# EAGLE board rtc module (EAGLE 6.5.0)
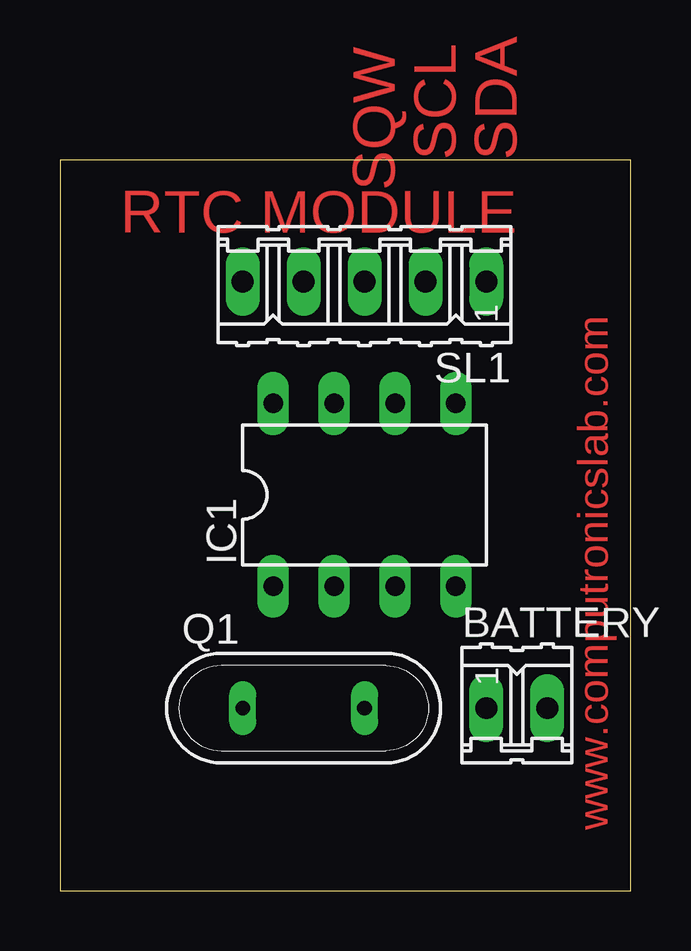
[diagram p0: board, top side]
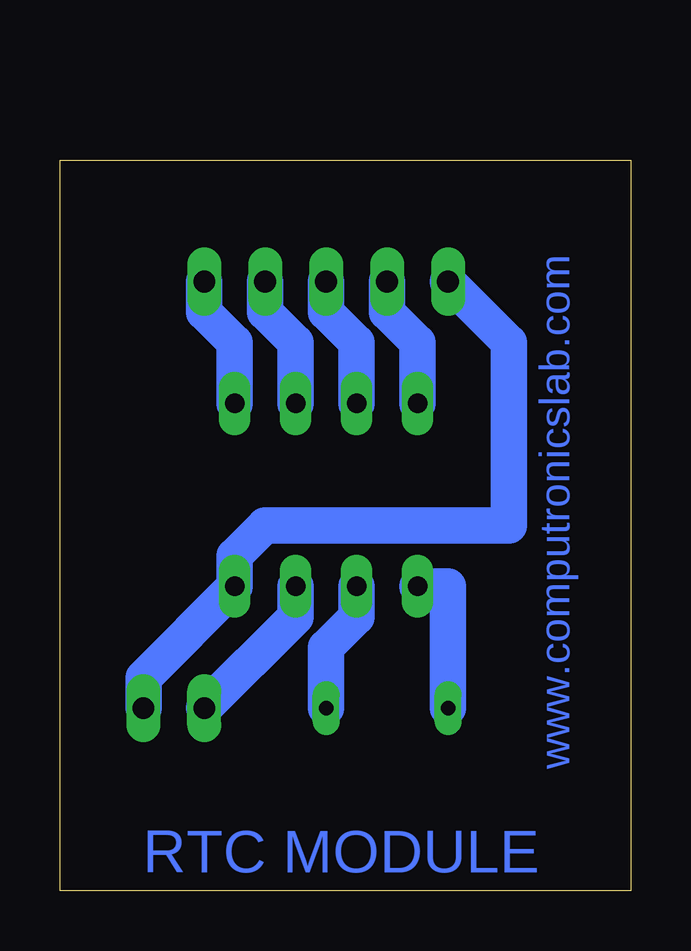
[diagram p1: board, bottom side, seen from below]

Size 23.8 x 30.47 mm. Coordinates in mm from the lower left corner, seen from the top.
Outline: 0,0 23.8,0 23.8,30.47 0,30.47 0,0
Copper layers (1*16): Top 0.035mm / dielectric 1.5mm / Bottom 0.035mm
Design rules "default *": minimum track width 60mil, minimum drill 24mil, track to track 8mil, track to pad 8mil, pad to pad 8mil, via to via 8mil, smd to smd 8mil, copper to edge 40mil, drill to drill 8mil, minimum pad ring 10mil, minimum via ring 8mil, stop-mask expansion 4mil, vias tented up to drill 0mil, thermal gap 10mil

## Footprints (pad centres in the part's own frame; a part is rotated, then mirrored left to right if it is on the bottom)
02P = drill 0.914 long: 1 -1.27,0; 2 1.27,0
DIL08 = drill 0.813 long: 1 -3.81,-3.81; 2 -1.27,-3.81; 3 1.27,-3.81; 4 3.81,-3.81; 5 3.81,3.81; 6 1.27,3.81; 7 -1.27,3.81; 8 -3.81,3.81
QS = drill 0.61 long: 1 -2.54,0; 2 2.54,0
05P = drill 0.914 long: 1 -5.08,0; 2 -2.54,0; 3 0,0; 4 2.54,0; 5 5.08,0

## Placement (x,y rotation side)
BATTERY  3.3v  [02P]  19.05,7.62 0 top
IC1  DS1307  [DIL08]  12.7,16.51 0 top
Q1  32KHZ  [QS]  10.16,7.62 0 top
SL1  5 pin  [05P]  12.7,25.4 180 top

## Library data of the parts
BATTERY SL1 = con-amp-quick; OC_FARNELL: unknown; OC_NEWARK: unknown
IC1 = maxim; MPN: DS1621; OC_FARNELL: 1188024; OC_NEWARK: 66F3769
Q1 = special

## Nets
N$1: IC1.1 Q1.1
N$2: IC1.2 Q1.2
N$3: IC1.6 SL1.2
N$4: IC1.7 SL1.3
N$5: IC1.8 SL1.4
N$6: BATTERY.1 IC1.3
N$7: BATTERY.2 IC1.4 SL1.5
N$8: IC1.5 SL1.1

## Tracks (layer width: path | path; a pad name or v marks a point on that pad's centre or on a via)
N$1
  Bottom 1.524: Q1.1 7.62,12.7 IC1.1
N$2
  Bottom 1.524: Q1.2 12.7,10.16 11.43,11.43 IC1.2
N$3
  Bottom 1.524: IC1.6 13.97,22.86 15.24,24.13 SL1.2
N$4
  Bottom 1.524: IC1.7 11.43,22.86 12.7,24.13 SL1.3
N$5
  Bottom 1.524: IC1.8 8.89,22.86 10.16,24.13 SL1.4
N$6
  Bottom 1.524: IC1.3 13.97,11.43 BATTERY.1
N$7
  Bottom 1.524: BATTERY.2 20.32,8.89 IC1.4 16.51,13.97 15.24,15.24 5.08,15.24 5.08,22.86 SL1.5
N$8
  Bottom 1.524: IC1.5 16.51,22.86 17.78,24.13 SL1.1

## Text on the board
Top: SCL | SDA | SQW | RTC MODULE | www.computronicslab.com
Bottom: www.computronicslab.com | RTC MODULE